# Altium PCB PMP30528_RevA.PcbDoc (part 1 of 3)
Units mil, origin at the board's own origin, x right, y up, seen from the top; angles counter-clockwise.
Board outline 2735.03 x 1328.78 mil, 2 copper layers (Top Layer, Bottom Layer), stack 62 mil thick; 91 components, 42 nets, 252 pads, 63 vias.
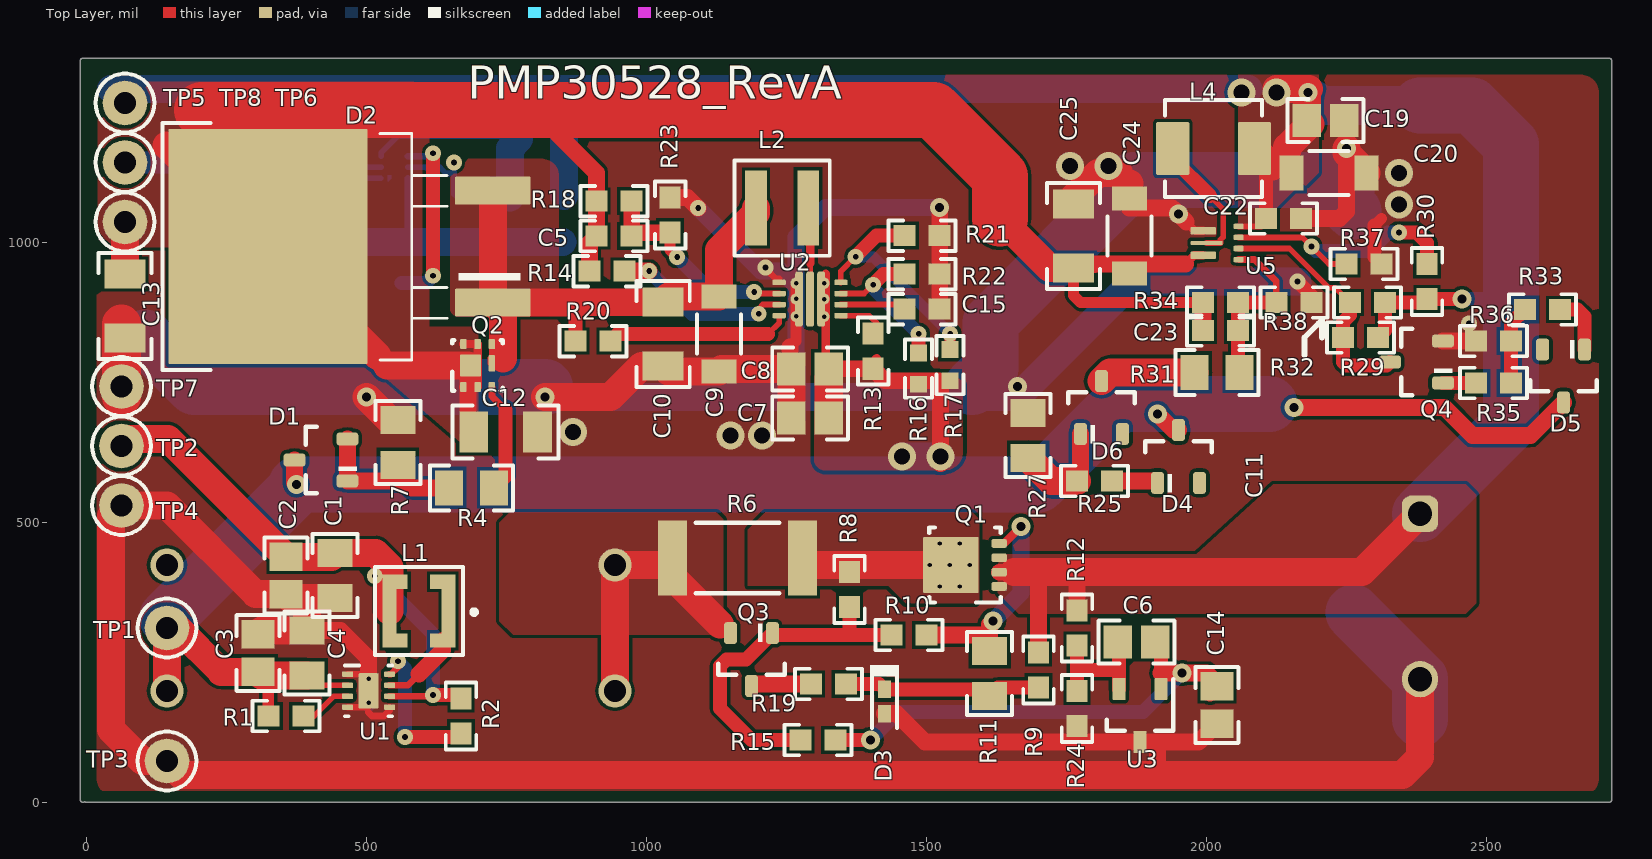
[diagram p0: Top Layer view]
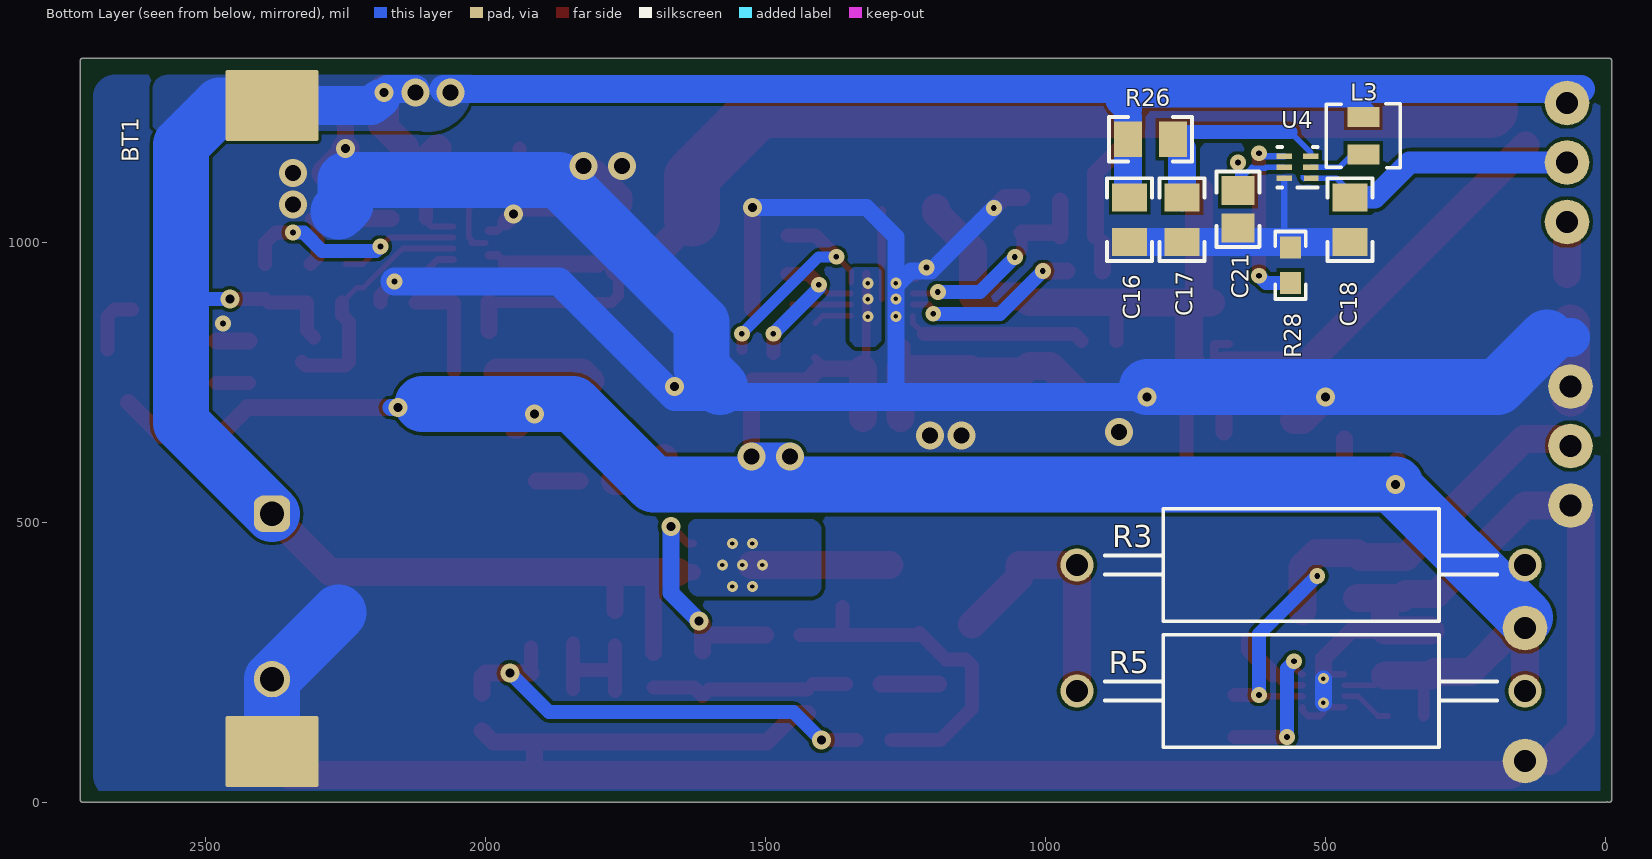
[diagram p1: Bottom Layer view, seen from below]

## Layer stack, top to bottom
Top Solder: solder mask 0.4, Solder Resist, Dk 3.5
Top Layer: signal copper 1.4
Dielectric1: core 59.2, FR-4, Dk 4.8
Bottom Layer: signal copper 1.4
Bottom Solder: solder mask 0.4, Solder Resist, Dk 3.5

## Board outline
-11.26,6.25 -11.26,1325 cw(c-6.25,1325) -6.25,1330.01 2718.75,1330.01 cw(c2718.75,1325) 2723.76,1325 2723.76,6.25 cw(c2718.75,6.25) 2718.75,1.23 0,1.23 cw(c0,6.25) -3.12,2.33 cw(c-6.25,6.25)

## Design rules (kind name [scope] priority, off if disabled: settings)
AcuteAngle [All] p1: minimum=2.80000000000000E+0001 checktracksonly=FALSE
AssemblyTestPointUsage [All] p1: valid=2
BoardOutlineClearance BoardOutlineClearance_MountingHoles [OnCopper and InComponentClass('Mounting Holes')] p1: gap=20 ignorepadtopadclearanceinfootprint=FALSE
BoardOutlineClearance BoardOutlineClearance_Poly [OnCopper and IsPoly] p2: gap=20 ignorepadtopadclearanceinfootprint=FALSE
BoardOutlineClearance [OnCopper and Not InComponentClass('Logo') and not InComponentClass('FiducialMark') and not InRegion(1000,500,4000,800) and not InPoly] p3: gap=15 ignorepadtopadclearanceinfootprint=FALSE
Clearance Clearance_Keepouts [((IsTrack Or IsArc) And Not InPoly) And IsFree and IsKeepOut vs ((IsTrack Or IsArc) And Not InPoly) And IsFree and IsKeepOut] p1: gap=0 ignorepadtopadclearanceinfootprint=FALSE
Clearance Clearance_Poly [InPolygon] p2 off: gap=30 ignorepadtopadclearanceinfootprint=FALSE
Clearance Clearance_FiducialMark [IsKeepOut and InComponentClass('FiducialMark') vs IsPad and InComponentClass('FiducialMark')] p3: gap=0 ignorepadtopadclearanceinfootprint=FALSE
Clearance [All] p4: gap=6 ignorepadtopadclearanceinfootprint=FALSE
ComponentClearance ComponentClearance_MountingHoles_FiducialMarks [InComponentClass('Mounting Holes') vs InComponentClass('FiducialMark')] p1: gap=20 collisioncheckmode=3 verticalgap=6 showdistances=FALSE
ComponentClearance ComponentClearance_Shunt [InComponentClass('Header') vs InComponentClass('Shunt')] p2: gap=0 collisioncheckmode=3 verticalgap=0 showdistances=FALSE
ComponentClearance ComponentClearance_Logo [InComponentClass('Logo')] p3: gap=20 collisioncheckmode=3 verticalgap=10 showdistances=FALSE
ComponentClearance ComponentClearance_ScrewToNut [(HasFootprint('NY PMS 440 0025 PH')) vs (HasFootprint('Keystone_1902C'))] p4: gap=5 collisioncheckmode=3 verticalgap=6 showdistances=FALSE
ComponentClearance ComponentClearance_MountingHoles [InComponentClass('Mounting Holes')] p5: gap=25 collisioncheckmode=3 verticalgap=100000 showdistances=FALSE
ComponentClearance ComponentClearance_SmallPassives [HasFootprint('0201*') or HasFootprint('0402*') or HasFootprint('0508') or HasFootprint('0603*') or HasFootprint('0612') or HasFootprint('0805*') or HasFootprint('0815*') or HasFootprint('0830*') or HasFootprint('1206*') or HasFootprint('1210*') or HasFootprint('1808*') or HasFootprint('1812*') or HasFootprint('1825*') or HasFootprint('2010*') or HasFootprint('2220*') or HasFootprint('2225*') or HasFootprint('2512*') or HasFootprint('2728*') or HasFootprint('3518*') vs HasFootprint('0201*') or HasFootprint('0402*') or HasFootprint('0508') or HasFootprint('0603*') or HasFootprint('0612') or HasFootprint('0805*') or HasFootprint('0815*') or HasFootprint('0830*') or HasFootprint('1206*') or HasFootprint('1210*') or HasFootprint('1808*') or HasFootprint('1812*') or HasFootprint('1825*') or HasFootprint('2010*') or HasFootprint('2220*') or HasFootprint('2225*') or HasFootprint('2512*') or HasFootprint('2728*') or HasFootprint('3518*')] p6: gap=6 collisioncheckmode=3 verticalgap=6 showdistances=FALSE
ComponentClearance ComponentClearance_THtoSMT [IsThruComponent vs IsSMTComponent] p7: gap=6 collisioncheckmode=3 verticalgap=6 showdistances=FALSE
ComponentClearance ComponentClearance_THtoTH [IsThruComponent vs IsThruComponent] p8: gap=6 collisioncheckmode=3 verticalgap=6 showdistances=FALSE
ComponentClearance [All] p9: gap=10 collisioncheckmode=3 verticalgap=10 showdistances=FALSE
DiffPairsRouting [All] p1: maxlimit=100 minlimit=10 mostfreqgap=10 toplayer_minwidth=15 toplayer_maxwidth=15 toplayer_prefwidth=15 bottomlayer_minwidth=15 bottomlayer_maxwidth=15 bottomlayer_prefwidth=15 maxuncoupledlength=1000
FabricationTestPointUsage TestPointUsage [All] p1: valid=2 allowmultiple=FALSE
FabricationTestpoint Testpoint [All] p1: side=3 testpointundercomponent=TRUE minsize=40 maxsize=100 preferedsize=60 minholesize=0 maxholesize=40 preferedholesize=32 testpointgrid=1 allowsidetop=TRUE allowsidebottom=TRUE usegrid=TRUE gridtolerance=0.01
FanoutControl Fanout_LCC [IsLCC] p1: bgadir=Out bgaviamode=Centered fanoutstyle=Auto fanoutdirection=Alternating viagrid=1 // Fanout_LCC (Default Rule)
FanoutControl Fanout_BGA [IsBGA] p2: bgadir=Out bgaviamode=Centered fanoutstyle=Auto fanoutdirection=Alternating viagrid=1 // Fanout_BGA (Default Rule)
FanoutControl Fanout_Default [All] p4: bgadir=Out bgaviamode=Centered fanoutstyle=Auto fanoutdirection=Alternating viagrid=1 // Fanout_Default (Default Rule)
FanoutControl Fanout_Small [(CompPinCount < 5)] p5: bgadir=Out bgaviamode=Centered fanoutstyle=Auto fanoutdirection=OutThenIn viagrid=1 // Fanout_Small (Default Rule)
Height [All] p1: minheight=0 maxheight=3000 prefheight=500
HoleSize [All] p1: absolutevalues=TRUE maxlimit=251 minlimit=6 maxpercent=80.000 minpercent=20.000
MinimumAnnularRing MinimumAnnularRing_ThermalPadVias [IsVia and InAnyComponent] p1: minimumring=5
MinimumAnnularRing [All] p2: minimumring=6
MinimumSolderMaskSliver MinimumSolderMaskSliver_Logo [InComponentClass('Logo') vs InComponentClass('Logo')] p1: minsoldermaskwidth=0.7
MinimumSolderMaskSliver [All] p2: minsoldermaskwidth=1
PlaneConnect [All] p1: planeconnectstyle=Relief reliefexpansion=10 reliefentries=4 reliefconductorwidth=10 reliefairgap=10
PolygonConnect [All] p1: connectstyle=Direct reliefconductorwidth=10 reliefentries=4 polygonreliefangle="90 Angle" airgapwidth=10
RoutingVias ThermalPadVias [IsVia and InAnyComponent] p1: holewidth=7.87 width=19.68 viastyle="Through Hole" minholewidth=7.87 minwidth=19.68 maxholewidth=12.99 maxwidth=23.62
RoutingVias [All] p2: holewidth=16 width=34 viastyle="Through Hole" minholewidth=7.87 minwidth=26 maxholewidth=40 maxwidth=65
SilkToBoardRegionClearance [Not ((IsComment or IsDesignator) And (Hide <> 'False')) and not InRegion(1000,500,4000,800)] p1:
SilkToSilkClearance SilkToSilkClearance_Pb-FreeLogo [(HasFootprint('Pb-Free_Overlay_Medium') OR HasFootprint('Pb-Free_Overlay_Small')) vs (HasFootprint('Pb-Free_Overlay_Medium') OR HasFootprint('Pb-Free_Overlay_Small'))] p1 off: silktosilkclearance=0
SilkToSilkClearance [All] p2 off: silktosilkclearance=0
SilkToSolderMaskClearance SilkToComponentPadClearance [(IsPad or IsFill or IsRegion) and InAnycomponent] p1 off: minsilkscreentomaskgap=5 clearancetoexposedcopper=TRUE
SilkToSolderMaskClearance "Silk to Solder Mask Opening" [All] p2 off: minsilkscreentomaskgap=4 clearancetoexposedcopper=FALSE
SolderMaskExpansion [All] p1: expansion=1.97
Width [All] p1: maxlimit=100 minlimit=6 preferedwidth=10 checkconnectedcopper=TRUE
14 further rules are at their usual default settings.

## Components (designator, comment, footprint, x,y, rotation, side; value= is the part's Value field where it differs from the comment)
BT1 "BU2032SM-BT-GTR" MPD_BU2032SM-BT-GTR 2381.25,668.75 r90 bottom
C1 "GRM21BR71A106KE51K" 0805_HV 443.75,406.25 r270 top value=10uF
C2 "Used in BOM report" 0805 356.25,406.25 r270 top value=DNP
C3 "Used in BOM report" 0805 306.25,267.82 r90 top value=DNP
C4 "GRM21BZ71E106KE15L" 0805_HV 393.75,267.82 r90 top value=10uF
C5 "DNP" 0603 942.09,1012.43 r0 top
C6 "Used in BOM report" 0805 1875,287.5 r0 top value=DNP
C7 "Used in BOM report" 0805 1292.09,687.43 r180 top value=DNP
C8 "GRM21BZ71E106KE15L" 0805 1292.09,774.93 r180 top value=10uF
C9 "GRM31CR70J106KA01L" 1206_180 1129.59,837.43 r270 top value=10uF
C10 "Used in BOM report" 1206 1029.59,837.43 r270 top value=DNP
C11 "HV1625-2R7256-R" HV_1600x2840 2381.25,368.75 r270 top value=25F
C12 "C3216X7R1A106K085AC" 1206 748.34,662.5 r0 top value=10uF
C13 "C3216X7R1A106K085AC" 1206 68.75,887.5 r270 top value=10uF
C14 "Used in BOM report" 0805 2018.75,175 r270 top value=DNP
C15 "C0603X222K5RACTU" 0603 1492.09,881.92 r0 top value=2200pF
C16 "GRM21BR70J106KE76L" 0805_HV 850,1041.54 r270 bottom value=10uF
C17 "GRM21BR71H104KA01L" 0805_HV 756.25,1041.54 r270 bottom value=0.1uF
C18 "GRM21BR70J106KE76L" 0805_HV 456.25,1041.54 r270 bottom value=10uF
C19 "Used in BOM report" 0805 2212.5,1218.75 r0 top value=DNP
C20 "GRM31CR70J226KE19L" 1206_180 2218.75,1125 r0 top value=22uF
C21 "Used in BOM report" 0805 656.25,1060.29 r270 bottom value=DNP
C22 "GRM188R71H104KA93D" 0603 2137.5,1043.75 r0 top value=0.1uF
C23 "DNP" 0603 2025,843.75 r0 top
C24 "GRM31CR70J106KA01L" 1206_180 1862.5,1012.5 r90 top value=10uF
C25 "Used in BOM report" 1206 1762.5,1012.5 r90 top value=DNP
D1 "BZX84C3V9LT1G" SOT-23 418.75,612.5 r180 top value=3.9V
D2 "STPS20L15" DDPAK 479.59,993.68 r180 top
D3 "DNP" SOD-523 1425,181.25 r270 top
D4 "MMBZ5231BLT1G" SOT-23 1950,618.75 r90 top value=5.1V
D5 "DNP" SOT-23 2637.5,762.5 r270 top
D6 "BAT54-7-F" SOT-23 1812.5,706.25 r90 top value=30V
L1 "LPS3015-332MLB" LPS3015 593.75,342.82 r180 top value=3.3uH
L2 "XFL4020-222MEB" XFL4020 1242.09,1062.43 r180 top value=2.2uH
L3 "VLF302510MT-4R7M" VLF302510MT 432.55,1191.54 r270 bottom value=4.7uH
L4 "74437346010" WE-LHMI_4020 2012.5,1168.75 r180 top value=1uH
Q1 "CSD25402Q3A" DNH0008A 1568.75,425 r180 top value=-20V
Q2 "CSD15571Q2" DQK0006C 698.34,781.18 r90 top value=20V
Q3 "MMBT2907ALT1G" SOT-23 1187.5,256.25 r270 top value="60 V"
Q4 "DNP" SOT-23 2375,787.5 r180 top
R1 "CRCW06030000Z0EA" 0603 356.25,155.32 r0 top value=0
R2 "CRCW0603100KFKEA" 0603 668.75,155.32 r90 top value=100k
R3 "PNP300JR-73-47R" PNP300 543.75,425 r0 bottom value=47
R4 "CRCW0805100RFKEA" 0805_HV 687.5,562.5 r0 top value=100
R5 "DNP" PNP300 543.75,200 r0 bottom
R6 "CRCW25122R00JNEG" 2512 1162.5,437.5 r0 top value=2.0
R7 "CRCW080549K9FKEA" 0805_HV 556.25,643.75 r270 top value=49.9k
R8 "CRCW0603200RFKEA" 0603 1362.5,381.25 r90 top value=200
R9 "CRCW060310K0FKEA" 0603 1700,237.5 r90 top value=10.0k
R10 "Used in BOM report" 0603 1468.75,300 r180 top value=DNP
R11 "CRCW0805100RFKEA" 0805_HV 1612.5,231.25 r90 top value=100
R12 "CRCW0603200RFKEA" 0603 1768.75,312.5 r90 top value=200
R13 "CRCW06030000Z0EA" 0603 1404.59,806.92 r90 top value=0
R14 "CRCW06030000Z0EA" 0603 929.59,949.93 r180 top value=0
R15 "CRCW06032K00FKEA" 0603 1306.25,112.5 r180 top value=2.00k
R16 "Used in BOM report" 0603_HV 1485.84,775.67 r270 top value=DNP
R17 "Used in BOM report" 0603_HV 1542.09,781.92 r270 top value=DNP
R18 "CRCW0603562KFKEA" 0603 942.09,1074.93 r180 top value=562k
R19 "CRCW06030000Z0EA" 0603 1325,212.5 r0 top value=0
R20 "CRCW0603100KFKEA" 0603 904.59,824.93 r180 top value=100k
R21 "RC0603JR-070RL" 0603 1492.09,1013.17 r180 top value=0
R22 "RC0603JR-070RL" 0603 1492.09,944.42 r180 top value=0
R23 "CRCW0603150KFKEA" 0603 1042.09,1049.93 r270 top value=150k
R24 "CRCW060310K0FKEA" 0603 1768.75,168.75 r90 top value=10.0k
R25 "CRCW06030000Z0EA" 0603 1800,575 r0 top value=0
R26 "CRCW0805390RJNEA" 0805_HV 812.5,1185.29 r180 bottom value=390
R27 "CRCW080549K9FKEA" 0805_HV 1681.25,656.25 r270 top value=49.9k
R28 "CRCW06030000Z0EA" 0603 562.5,960.29 r90 bottom value=0
R29 "Used in BOM report" 0603 2275,831.25 r0 top value=DNP
R30 "Used in BOM report" 0603 2393.75,931.25 r270 top value=DNP
R31 "CRCW080549K9FKEA" 0805_HV 2018.75,768.75 r0 top value=49.9k
R32 "CRCW06030000Z0EA" 0603 2287.5,893.75 r180 top value=0
R33 "Used in BOM report" 0603 2600,881.25 r0 top value=DNP
R34 "CRCW0603453KFKEA" 0603 2025,893.75 r180 top value=453k
R35 "Used in BOM report" 0603 2512.5,750 r0 top value=DNP
R36 "Used in BOM report" 0603 2512.5,825 r0 top value=DNP
R37 "CRCW06030000Z0EA" 0603 2281.25,962.5 r180 top value=0
R38 "CRCW0603100KFKEA" 0603 2156.25,893.75 r180 top value=100k
TP1 "5000" Keystone5000 143.75,312.5 r0 top
TP2 "5000" Keystone5000 62.5,637.5 r90 top
TP3 "5001" Keystone5001 143.75,75 r90 top
TP4 "5001" Keystone5001 62.5,531.25 r90 top
TP5 "5000" Keystone5000 68.75,1250 r90 top
TP6 "5000" Keystone5000 68.75,1037.5 r90 top
TP7 "5001" Keystone5001 62.5,743.75 r90 top
TP8 "5000" Keystone5000 68.75,1143.75 r90 top
U1 "TPS62173DSGT" DSG0008A 503.75,200.32 r0 top
U2 "TPS62147RGXT" RGX0011A 1292.09,899.93 r270 top
U3 "TL431CDBZTG4" DBZ0003A_N 1881.25,156.25 r270 top
U4 "TPS610981DSER" DSE0006A 550,1135.29 r0 bottom
U5 "TPS61022RWUT" RWU0007A 2018.75,1000 r0 top

## Footprints (in the part's own frame and the unit in brackets; to place one, negate y for a bottom-side part, rotate by r counter-clockwise, add the part's x,y. Pads: shape width x height; smd on the part's side, far side on the other; paste and mask are expansions set on the pad)
0603 [mm] "0603 from SM-752 data"
  rect 1x0.95 smd: 1(-0.8,0) 2(0.8,0)
  silkscreen extent -1.52,-0.69 1.52,0.69, body extent -0.87,-0.47 0.87,0.47, height 1
0603_HV [mil] "Ernesto recommended land pattern.  26 mil between pads."
  rect 30x30 smd: 1(-28,0) 2(28,0)
  silkscreen extent -52,-24 52,24, body extent -34,-19 34,19, height 39
0805 [mm] "0805 from SM-752 data"
  rect 1.3x1.5 smd: 1(-0.85,0) 2(0.85,0)
  silkscreen extent -1.72,-0.97 1.72,0.97, body extent -1.1,-0.72 1.1,0.72, height 1.45
0805_HV [mil] "0805 with 30mil clearance between pads"
  rect 50x63 smd: 1(-40,0) 2(40,0)
  silkscreen extent -74,-40 74,40, body extent -43,-29 43,29, height 57
1206 [mm] "1206 from SM-752 data"
  rect 1.3x1.85 smd: 1(-1.45,0) 2(1.45,0)
  silkscreen extent -2.4,-1.21 2.4,1.21, body extent -1.7,-0.9 1.7,0.9, height 1.35
1206_180 [mm] "1206_180"
  rect 1.1x1.6 smd: 1(-1.7,0) 2(1.7,0)
  silkscreen extent -0.9,-1 0.9,1, body extent -1.75,-0.95 1.75,0.95, height 1.8
2512 [mm] "Chip Resistor, Body 6.3x3.2mm, IPC Medium Density"
  rect 1.3x3.4 smd: 1(-2.95,0) 2(2.95,0)
  silkscreen extent -1.9,-1.6 1.9,1.6, body extent -3.22,-1.67 3.22,1.67, height 0.71
DBZ0003A_N [mm] "SOT23, 3-Leads, Body 2.9x1.3mm, Pitch 0.95mm, Lead Span 2.4mm, IPC Medium Density"
  rrect17% 1x0.6 smd: 1(-1.2,0.95) 2(-1.2,-0.95) 3(1.2,0)
  silkscreen extent -1.65,-1.5 0.7,1.5, body extent -1.26,-1.46 1.26,1.46, height 0.98
DDPAK [mil] "D2-PAK, 3-Pads, Body 9.7x10.4mm (max), TO-263AB, using Vishay Silionix recommended pad sizes"
  rrect8% 135x49.49 smd: 1(-246.06,100) 3(-246.06,-100)
  rrect1% 355x420 smd paste-181.1: 4(155.51,0)
  silkscreen extent -295,-220 344,220, body extent -295,-202 324,202, height 180
DNH0008A [mm] "8 pin VSONP, 0.65 mm pitch"
  rrect50% 0.7x0.4 smd paste-0.05 mask-0.05: 1(-1.55,0.975) 2(-1.55,0.325) 3(-1.55,-0.325) 4(-1.55,-0.975) 5(1.55,-0.975) 6(1.55,-0.325) 7(1.55,0.325) 8(1.55,0.975)
  rrect14% 0.705x1.125 on Top Paste: 9(-0.208,0.662) 9(-0.208,-0.663) 9(0.697,0.662) 9(0.697,-0.663)
  rrect6% 1.775x2.45 on Top Solder: 9(0.327,0)
  rrect4% 2.51x2.55 smd paste-1.5 mask-1.5: 9(0.645,0)
  rect 0.5x0.3 on Top Solder: 9(1.175,0.975) 9(1.175,-0.325) 9(1.175,0.325) 9(1.175,-0.975)
  silkscreen extent -1.62,-1.7 1.62,1.7, body extent -1.65,-1.65 1.65,1.66, height 0.91
DQK0006C [mm] "WSON"
  rrect12% 0.9x0.86 on Top Paste: 0(0,0.325)
  rrect34% 0.7x0.29 on Top Paste: 0(0.095,-0.65)
  rrect33% 0.45x0.3 smd: 1(-0.975,0.65) 2(-0.975,0) 3(-0.975,-0.65) 4(0.975,-0.65) 5(0.975,0) 6(0.975,0.65)
  rrect33% 0.75x0.3 smd paste-0.15: 7(0.095,-0.65)
  rrect11% 1x0.95 smd paste-0.5: 8(0,0.325)
  silkscreen extent -1.15,-1.15 1.15,1.15, body extent -1,-1 1,1, height 0.82
DSE0006A [mm] "TI recommended land pattern"
  rect 0.66x0.25 smd: 1(-0.62,0.5)
  rect 0.7x0.25 smd: 2(-0.6,0) 3(-0.6,-0.5) 4(0.6,-0.5) 5(0.6,0) 6(0.6,0.5)
  Top Layer region: -0.3,0.625 -0.25,0.625 -0.15,0.525 -0.15,0.375 -0.3,0.375
  silkscreen extent -0.9,-0.92 0.9,0.92, body extent -0.77,-0.77 0.77,0.77, height 0.8
DSG0008A [mm] "SON, 8-Leads, Body 2x2mm, Pitch 0.5mm, Thermal Pad 1.6x0.9mm, TI Recommended"
  rrect40% 0.5x0.25 smd: 1(-0.95,0.75) 2(-0.95,0.25) 3(-0.95,-0.25) 4(-0.95,-0.75) 5(0.95,-0.75) 6(0.95,-0.25) 7(0.95,0.25) 8(0.95,0.75)
  rrect14% 0.9x0.7 on Top Paste: 9(0,-0.45) 9(0,0.45)
  rrect11% 0.9x1.6 smd paste-0.45: 9(0,0)
  silkscreen extent -1.07,-1.15 1.07,1.15, body extent -1,-1 1,1, height 0.77
HV_1600x2840 [mm] "TH, 2-Leads, Dia 16mm, Pin Spacing 7.5mm"
  rrect50% 1.65x1.65 hole 1.1: 1(-3.75,0)
  round 1.65 hole 1.1: 2(3.75,0)
  body extent -8.25,-8.25 8.26,8.25, height 28.4
Keystone5000 [mil] "For Keystone 500x miniature loop terminals"
  round 80 hole 40: 1(0,0)
  silkscreen extent -52,-52 52,52, body extent -49,-49 49,49, height 182
Keystone5001 [mil] "For Keystone 500x miniature loop terminals"
  round 80 hole 40: 1(0,0)
  silkscreen extent -52,-52 52,52, body extent -49,-49 49,49, height 182
LPS3015 [mm] "Coilcraft recommended land pattern.  Document 436-2, rev 12/3/08"
  rect 0.63x3.3 smd: 1(-1.335,0) 2(1.335,0)
  rect 1.14x0.64 smd: 1(-1.08,1.33) 1(-1.08,-1.33) 2(1.08,1.33) 2(1.08,-1.33)
  silkscreen extent -2.59,-2 2,2, body extent -1.58,-1.58 1.58,1.58, height 1.52
MPD_BU2032SM-BT-GTR [mm] "SMD, 2-Leads, Body 31.86x16mm"
  rrect3% 3.2x4.2 smd: 1(-14.65,0) 2(14.65,0)
  body extent -15.93,-8 15.93,8, height 5.2
PNP300 [mm] "yageo"
  round 1.5 hole 1: 1(-10.16,0) 2(10.16,0)
  silkscreen extent -8.89,-2.55 8.89,2.55, body extent -10.58,-2.55 10.58,2.55, height 5.1
RGX0011A [mm] "VQFN, 11-Leads, Body 3x2mm, Pitch 0.5mm"
  rrect40% 0.66x0.25 on Top Paste: 1(-0.86,0.5) 1(0,0.5) 1(0.86,0.5) 2(-0.86,0) 2(0,0) 2(0.86,0) 3(-0.86,-0.5) 3(0,-0.5) 3(0.86,-0.5)
  rrect57% 2.5x0.35 smd paste-2.4 mask-0.05: 1(0,0.5) 2(0,0) 3(0,-0.5)
  rrect40% 0.25x0.6 smd: 4(-0.75,-1.4) 5(-0.25,-1.4) 6(0.25,-1.4) 7(0.75,-1.4) 8(0.75,1.4) 9(0.25,1.4) 10(-0.25,1.4) 11(-0.75,1.4)
  body extent -1,-1.5 1,1.5, height 1
RWU0007A [mm] "VQFN-HR-7"
  rrect29% 0.475x0.35 on Top Paste: 1(-0.962,0.55) 1(-0.288,0.55) 3(-0.962,-0.55) 3(-0.288,-0.55)
  rrect29% 1.15x0.35 smd paste-0.5: 1(-0.625,0.55) 3(-0.625,-0.55)
  rrect50% 0.625x0.2 on Top Paste: 2(-0.888,0) 2(-0.062,0)
  rrect50% 1.45x0.2 smd paste-0.5: 2(-0.475,0)
  rrect40% 0.45x0.25 smd: 4(0.975,-0.75) 5(0.975,-0.25) 6(0.975,0.25) 7(0.975,0.75)
  body extent -1.05,-1.05 1.05,1.05, height 1.01
SOD-523 [mm] "NXP Semiconductor recommended land pattern, nominal STEP model"
  rect 0.8x0.6 smd paste-0.05: 1(-0.55,0) 2(0.55,0)
  silkscreen extent -1.65,-0.66 1.2,0.66, body extent -0.8,-0.4 0.8,0.4, height 0.72
SOT-23 [mm] "SOT23, 3-Leads, Body 2.9x1.3mm, Pitch 0.95mm, Lead Span 2.5mm, IPC Medium Density"
  rrect50% 1x0.6 smd: 1(-1.2,0.95) 2(-1.2,-0.95) 3(1.2,0)
  silkscreen extent -1.63,-1.5 0.7,1.5, body extent -1.16,-1.45 1.21,1.45, height 1
VLF302510MT [mm] "TDK"
  rect 0.9x1.45 smd: 1(-0.85,0) 2(0.85,0)
  silkscreen extent -1.45,-1.68 1.45,1.68, body extent -1.35,-1.6 1.35,1.6, height 1
WE-LHMI_4020 [mm] "WERTH"
  rrect7% 1.5x2.4 smd: 1(-1.85,0) 2(1.85,0)
  silkscreen extent -2.2,-2.2 2.2,2.2, body extent -2.15,-2.15 2.15,2.15, height 2
XFL4020 [mm] "Coilcraft XFL4020 7/18/12"
  rect 0.98x3.4 smd: 1(-1.181,0) 2(1.181,0)
  silkscreen extent -2.16,-2.16 2.16,2.16, body extent -2.15,-2.15 2.15,2.15, height 2.1

## Part data
BT1: library part CMP-0081781-1, "HOLDER CR2032 GOLD LEADS SMD", Manufacturer="Memory Protection Devices", Supplier Part Number 1=BU2032SM-BT-GCT-ND, ComponentLink1Description="Datasheet Link", ComponentLink1URL=http://www.memoryprotectiondevices.com/datasheets/BU2032SM-BT-GTR-datasheet.pdf, CompType="Battery Holder", Key=BU2032SM-BT-GTR, MountType=SMT, PackageReference=31.86x16mm, PartNumber=BU2032SM-BT-GTR, RoHS=Y, Supplier 1=Digi-Key
C1: "CAP, CERM, 10 µF, 10 V,+/- 10%, X7R, 0805", Cap_Case=0805, Manufacturer=MuRata, Supplier Part Number 1=490-6477-1-ND, TempCo=X7R, Tolerance_%=10, Value2=10V, ValueDisplayed=10µF, AEC Category=Q200, AEC Qualified=?, Cap_F=0.00001, ComponentLink1Description="Datasheet link", ComponentLink1URL=http://www.murata.com/~/media/webrenewal/support/library/catalog/products/capacitor/mlcc/c02e.ashx, CompType=Capacitor, Green_EU RoHS=Passed, Green_EU RoHS-2=Incomplete, Green_Lifecycle=Active, Green_REACh=Passed, LatestRevisionDate=2017-06-22, MountType=SMT, PackageReference=0805, PartNumber=GRM21BR71A106KE51K, Polarized=N, Published=2008-06-19, Publisher="Texas Instruments", RoHS=Y, SizeArea_mm2=2.5, SizeAreaWB_mm2=6.75, SizeX_mm=2, SizeY_mm=1.25, SizeZ_mm=1.45, Supplier 1=Digi-Key, Supplier 2=Mouser, Supplier Part Number 2=81-GRM21BR71A106KE1K, SymbolVersion=2008-07-09, TaMax_C=125, TaMin_C=-55, Technology=Ceramic, U/M=EA, VDC_V=10
C2 C3 C6 C7 C10 C14 C19 C21 C25: library part Capacitor, "CAP, CERM, xxxF, xxV, [TempCo], xx%, [PackageReference]", Alternate Manufacturer=-, Alternate PartNumber=-, ComponentLink1Description="Datasheet Link", ComponentLink1URL="Paste URL for datasheet here", CompType=Capacitor, LatestRevisionDate=2017-05-31, LatestRevisionNote="Added Alternate PartNumber and Alternate Manufacturer parameters to appropriate components.", Manufacturer="Used in BOM report", MountType="SMT or TH (used in PnP report)", PackageReference="Used in PnP output and some BOM reports", PartNumber="Used in BOM report", Polarized=N, Publisher="Texas Instruments", RoHS="Used in BOM report.  Use Y or N.", SymbolVersion=2008-07-09, U/M=EA
C4 C8: "CAP, CERM, 10 µF, 25 V,+/- 10%, X7R, 0805", Cap_Case=0805, Manufacturer=MuRata, Supplier Part Number 1=81-GRM21BZ71E106KE5L, TempCo=X7R, Tolerance_%=10, Value2=25V, ValueDisplayed=10µF, AEC Category=Q200, AEC Grade=N/A, AEC Qualified=N, Cap_F=0.00001, ComponentLink1Description="Datasheet link", ComponentLink1URL=http://search.murata.co.jp/Ceramy/image/img/A01X/G101/ENG/GRM21BZ71E106KE15-01.pdf, CompType=Capacitor, LatestRevisionDate=2017-06-22, MountType=SMT, PackageReference=0805, PartNumber=GRM21BZ71E106KE15L, Polarized=N, Published=2008-06-19, Publisher="Texas Instruments", RoHS=Y, SizeArea_mm2=2.5, SizeAreaWB_mm2=6.75, SizeX_mm=2, SizeY_mm=1.25, SizeZ_mm=1.45, Supplier 1=Mouser, SymbolVersion=2008-07-09, TaMax_C=125, TaMin_C=-55, Technology=Ceramic, U/M=EA, VDC_V=25
C5 C23: library part Capacitor, "CAP, CERM, xxxF, xxV, [TempCo], xx%, [PackageReference]", Alternate Manufacturer=-, Manufacturer="Used in BOM report", Alternate PartNumber=-, ComponentLink1Description="Datasheet Link", ComponentLink1URL="Paste URL for datasheet here", CompType=Capacitor, LatestRevisionDate=2017-05-31, LatestRevisionNote="Added Alternate PartNumber and Alternate Manufacturer parameters to appropriate components.", MountType="SMT or TH (used in PnP report)", PackageReference="Used in PnP output and some BOM reports", PartNumber=DNP, Polarized=N, Publisher="Texas Instruments", RoHS="Used in BOM report.  Use Y or N.", SymbolVersion=2008-07-09, U/M=EA
C9 C24: "CAP, CERM, 10 µF, 6.3 V,+/- 10%, X7R, 1206", Cap_Case=1206, Manufacturer=MuRata, Supplier Part Number 1=490-1806-1-ND, TempCo=X7R, Tolerance_%=10, Value2=6.3V, ValueDisplayed=10µF, AEC Category=Q200, AEC Qualified=?, Cap_F=0.00001, ComponentLink1Description="Datasheet link", ComponentLink1URL=http://search.murata.co.jp/Ceramy/PnsearchViewAction.do?HnOFG=ON&HnNFG=ON&SEL_CNT=50&sLang=en&sKey=GRM31CR70J106KA01L&x=9&y=9&search=startwith, CompType=Capacitor, LatestRevisionDate=2017-06-22, MountType=SMT, PackageReference=1206, PartNumber=GRM31CR70J106KA01L, Polarized=N, Published=2008-06-19, Publisher="Texas Instruments", RoHS=Y, SizeArea_mm2=5.12, SizeAreaWB_mm2=10.92, SizeX_mm=3.2, SizeY_mm=1.6, SizeZ_mm=1.8, Supplier 1=Digi-Key, Supplier 2=Mouser, Supplier 3=Farnell, Supplier Part Number 2=81-GRM426X106K6.3L, Supplier Part Number 3=9527729, SymbolVersion=2008-07-09, TaMax_C=125, TaMin_C=-55, Technology=Ceramic, U/M=EA, VDC_V=6.3
C11: library part CMP-0084049-1, "CAP, Electric Double Layer, 25000000 µF, 2.7 V,+30/-10%, 0.027 ohm, TH", Cap_Case=16x28.4mm, Manufacturer=Eaton, Tolerance_%=30%, Value1="0.027 ohm", Value2=2.7V, ValueDisplayed=25F, AEC Category=Q200, AEC Grade=N/A, AEC Qualified=N, Cap_F=25F, ComponentLink1Description="Datasheet link", ComponentLink1URL=http://www.cooperindustries.com/content/dam/public/bussmann/Electronics/Resources/product-datasheets/Bus_Elx_DS_4376_HV_Series.pdf, CompType=Capacitor, ESR_ohm=0.027, MountType=TH, PackageReference="Dia 16mm", PartNumber=HV1625-2R7256-R, Polarized=Y, RoHS=Y, Series=HV, SizeArea_mm2=256, SizeAreaWB_mm2=324, SizeX_mm=16, SizeY_mm=16, SizeZ_mm=28.4, TaMax_C=65°C, TaMin_C=-40°C, Technology="Electric Double Layer", VDC_V=2.7V
C12: library part CMP-0008687-2, "CAP, CERM, 10 uF, 6.3 V, +/- 10%, X7R, 1206", Cap_Case=1206, Manufacturer=TDK, Supplier Part Number 1=445-14793-1-ND, TempCo=X7R, Tolerance_%=10%, Value1="0.002454 ohm", Value2=6.3V, ValueDisplayed=10uF, AEC Category=Q200, AEC Grade=N/A, AEC Qualified=N, Cap_F=10µF, ComponentLink1Description="Datasheet link", ComponentLink1URL=https://product.tdk.com/en/search/capacitor/ceramic/mlcc/info?part_no=C3216X7R1A106K085AC, CompType=Capacitor, ESR_ohm=2.454m, IRMS_A=4.63182A, LatestRevisionDate=2017-03-09, MountType=SMT, PackageReference=1206, Polarized=N, Published=2008-06-19, Publisher="Texas Instruments", RoHS=Y, SizeArea_mm2=5.12, SizeAreaWB_mm2=10.92, SizeX_mm=3.2, SizeY_mm=1.6, SizeZ_mm=1.35, Supplier 1=Digi-Key, Supplier 2=Mouser, Supplier Part Number 2=810-C3216X7R1A106K085AC, TaMax_C=125°C, TaMin_C=-55°C, Technology=Ceramic, U/M=EA, VDC_V=6.3V
C13: library part CMP-0008687-2, "CAP, CERM, 1206", Cap_Case=1206, Manufacturer=TDK, PartNumber=DNP, Supplier Part Number 1=445-14793-1-ND, TempCo=X7R, Tolerance_%=10%, Value1="0.002454 ohm", Value2=10V, AEC Category=Q200, AEC Grade=N/A, AEC Qualified=N, Cap_F=10µF, ComponentLink1Description="Datasheet link", ComponentLink1URL=https://product.tdk.com/en/search/capacitor/ceramic/mlcc/info?part_no=C3216X7R1A106K085AC, CompType=Capacitor, ESR_ohm=2.454m, IRMS_A=4.63182A, LatestRevisionDate=2017-03-09, MountType=SMT, PackageReference=1206, Polarized=N, Published=2008-06-19, Publisher="Texas Instruments", RoHS=Y, SizeArea_mm2=5.12, SizeAreaWB_mm2=10.92, SizeX_mm=3.2, SizeY_mm=1.6, SizeZ_mm=1.35, Supplier 1=Digi-Key, Supplier 2=Mouser, Supplier Part Number 2=810-C3216X7R1A106K085AC, TaMax_C=125°C, TaMin_C=-55°C, Technology=Ceramic, U/M=EA, ValueDisplayed=DNP, VDC_V=DNP
C15: "CAP, CERM, 2200 pF, 50 V,+/- 10%, X7R, 0603", Cap_Case=0603, Manufacturer=Kemet, Supplier Part Number 1=399-5341-1-ND, TempCo=X7R, Tolerance_%=10, Value2=50V, ValueDisplayed=2200pF, AEC Category=Q200, AEC Qualified=?, Cap_F=0.0000000022, ComponentLink1Description="Datasheet link", ComponentLink1URL=http://www.kemet.com/kemet/web/homepage/kechome.nsf/vapubfiles/F3102_Y5V.pdf/$file/F3102_Y5V.pdf, CompType=Capacitor, Green_EU RoHS=Passed, Green_EU RoHS-2=Passed, Green_Lifecycle=Active, Green_REACh=Passed, LatestRevisionDate=2017-06-22, MountType=SMT, PackageReference=0603, PartNumber=C0603X222K5RACTU, Polarized=N, Published=2008-06-19, Publisher="Texas Instruments", RoHS=Y, SizeArea_mm2=1.28, SizeAreaWB_mm2=4.68, SizeX_mm=1.6, SizeY_mm=0.8, SizeZ_mm=1, Supplier 1=Digi-Key, Supplier 2=Mouser, Supplier 3=Farnell, Supplier Part Number 2=80-C0603X222K5R, Supplier Part Number 3=1414030, SymbolVersion=2008-07-09, TaMax_C=125, TaMin_C=-55, Technology=Ceramic, U/M=EA, VDC_V=50
C16 C18: "CAP, CERM, 10 µF, 6.3 V,+/- 10%, X7R, 0805", Cap_Case=0805, Manufacturer=MuRata, Supplier Part Number 1=490-3904-1-ND, TempCo=X7R, Tolerance_%=10, Value2=6.3V, ValueDisplayed=10µF, AEC Category=Q200, AEC Qualified=?, Cap_F=0.00001, ComponentLink1Description="Datasheet link", ComponentLink1URL=http://search.murata.co.jp/Ceramy/PnsearchViewAction.do?HnOFG=ON&HnNFG=ON&SEL_CNT=50&sLang=en&sKey=GRM21BR70J106KE76L&x=9&y=9&search=startwith, CompType=Capacitor, Green_EU RoHS=Passed, Green_EU RoHS-2=Incomplete, Green_Lifecycle=Active, Green_REACh=Passed, LatestRevisionDate=2017-06-22, MountType=SMT, PackageReference=0805, PartNumber=GRM21BR70J106KE76L, Polarized=N, Published=2008-06-19, Publisher="Texas Instruments", RoHS=Y, SizeArea_mm2=2.5, SizeAreaWB_mm2=6.75, SizeX_mm=2, SizeY_mm=1.25, SizeZ_mm=1.45, Supplier 1=Digi-Key, Supplier 2=Mouser, Supplier 3=Farnell, Supplier Part Number 2=81-GRM21BR70J106KE76, Supplier Part Number 3=1845768, SymbolVersion=2008-07-09, TaMax_C=125, TaMin_C=-55, Technology=Ceramic, U/M=EA, VDC_V=6.3
C17: "CAP, CERM, 0.1 µF, 50 V,+/- 10%, X7R, 0805", Cap_Case=0805, Manufacturer=MuRata, Supplier Part Number 1=490-1666-1-ND, TempCo=X7R, Tolerance_%=10, Value2=50V, ValueDisplayed=0.1µF, AEC Category=Q200, AEC Qualified=?, Cap_F=0.0000001, ComponentLink1Description="Datasheet link", ComponentLink1URL=http://search.murata.co.jp/Ceramy/PnsearchViewAction.do?HnOFG=ON&HnNFG=ON&SEL_CNT=50&sLang=en&sKey=GRM21BR71H104KA01L&x=9&y=9&search=startwith, CompType=Capacitor, Green_EU RoHS=Passed, Green_EU RoHS-2=Incomplete, Green_Lifecycle=Active, Green_REACh=Passed, LatestRevisionDate=2017-06-22, MountType=SMT, PackageReference=0805, PartNumber=GRM21BR71H104KA01L, Polarized=N, Published=2008-06-19, Publisher="Texas Instruments", RoHS=Y, SizeArea_mm2=2.5, SizeAreaWB_mm2=6.75, SizeX_mm=2, SizeY_mm=1.25, SizeZ_mm=1.45, Supplier 1=Digi-Key, Supplier 2=Mouser, Supplier 3=Farnell, Supplier Part Number 2=81-GRM40X104K50L, Supplier Part Number 3=8820120, SymbolVersion=2008-07-09, TaMax_C=125, TaMin_C=-55, Technology=Ceramic, U/M=EA, VDC_V=50
C20: "CAP, CERM, 22 µF, 6.3 V,+/- 10%, X7R, 1206", Cap_Case=1206, Manufacturer=MuRata, Supplier Part Number 1=GRM31CR70J226KE19L-ND, TempCo=X7R, Tolerance_%=10, Value2=6.3V, ValueDisplayed=22µF, AEC Category=Q200, AEC Qualified=?, Cap_F=0.000022, ComponentLink1Description="Datasheet link", ComponentLink1URL=http://search.murata.co.jp/Ceramy/PnsearchViewAction.do?HnOFG=ON&HnNFG=ON&SEL_CNT=50&sLang=en&sKey=GRM31CR70J226KE19L&x=9&y=9&search=startwith, CompType=Capacitor, LatestRevisionDate=2017-06-22, MountType=SMT, PackageReference=1206, PartNumber=GRM31CR70J226KE19L, Polarized=N, Published=2008-06-19, Publisher="Texas Instruments", RoHS=Y, SizeArea_mm2=5.12, SizeAreaWB_mm2=10.92, SizeX_mm=3.2, SizeY_mm=1.6, SizeZ_mm=1.8, Supplier 1=Digi-Key, Supplier 2=Mouser, Supplier 3=Farnell, Supplier Part Number 2=81-GRM31CR70J226KE9L, Supplier Part Number 3=1845771, SymbolVersion=2008-07-09, TaMax_C=125, TaMin_C=-55, Technology=Ceramic, U/M=EA, VDC_V=6.3
C22: "CAP, CERM, 0.1 µF, 50 V,+/- 10%, X7R, 0603", Cap_Case=0603, Manufacturer=MuRata, Supplier Part Number 1=490-1519-1-ND, TempCo=X7R, Tolerance_%=10, Value2=50V, ValueDisplayed=0.1µF, AEC Category=Q200, AEC Qualified=?, Cap_F=0.0000001, ComponentLink1Description="Datasheet link", ComponentLink1URL=http://search.murata.co.jp/Ceramy/PnsearchViewAction.do?HnOFG=ON&HnNFG=ON&SEL_CNT=50&sLang=en&sKey=GRM188R71H104KA93D&x=9&y=9&search=startwith, CompType=Capacitor, Green_EU RoHS=Passed, Green_EU RoHS-2=Incomplete, Green_Lifecycle=Active, Green_REACh=Passed, LatestRevisionDate=2017-06-22, MountType=SMT, PackageReference=0603, PartNumber=GRM188R71H104KA93D, Polarized=N, Published=2008-06-19, Publisher="Texas Instruments", RoHS=Y, SizeArea_mm2=1.28, SizeAreaWB_mm2=4.68, SizeX_mm=1.6, SizeY_mm=0.8, SizeZ_mm=1, Supplier 1=Digi-Key, Supplier 2=Mouser, Supplier 3=Farnell, Supplier Part Number 2=81-GRM39X104K50D, Supplier Part Number 3=8820023, SymbolVersion=2008-07-09, TaMax_C=125, TaMin_C=-55, Technology=Ceramic, U/M=EA, VDC_V=50
D1: "Diode, Zener, 3.9 V, 225 mW, SOT-23", Manufacturer="ON Semiconductor", Power_W=0.225, Supplier Part Number 1=BZX84C3V9LT1GOSCT-ND, Value1=0.225W, AEC Category=Q101, AEC Qualified=?, ComponentLink1Description="Datasheet link", ComponentLink1URL=http://www.onsemi.com/pub_link/Collateral/BZX84C2V4LT1-D.PDF, CompType=Zener, LatestRevisionDate=2017-06-20, LatestRevisionNote="Updated Supplier Data", MountType=SMT, PackageReference=SOT-23, PartNumber=BZX84C3V9LT1G, Published=2008-10-08, Publisher="Texas Instruments", RJA_CperW=556, RoHS=Y, SizeArea_mm2=7.5, SizeAreaWB_mm2=14, SizeX_mm=2.5, SizeY_mm=3, SizeZ_mm=1.1, Supplier 1=Digi-Key, Supplier 2=Newark, Supplier 3=Mouser, Supplier Part Number 2=98H0523, Supplier Part Number 3=863-BZX84C3V9LT1G, SymbolVersion=2010-08-25, U/M=EA, Vr_V=N/A, Vz_V=3.9
D2: library part DIODE_SCHOTTKY_A13C4, "Diode, Schottky", Alternate Manufacturer=-, Average Rectified Current=20A, Case/Package=TO-220-2, Forward Voltage=520mV, Manufacturer="Used in BOM report", Max Forward Surge Current (Ifsm)=310A, Max Operating Temperature=125°C, Max Repetitive Reverse Voltage (Vrrm)=15V, Max Reverse Leakage Current=6mA, Min Operating Temperature=-65°C, Package Quantity=50, Supplier Part Number 1=497-7551-5-ND, Alternate PartNumber=-, ComponentLink1Description="Datasheet Link", ComponentLink1URL="Paste URL for datasheet here", ComponentLink2Description=http://components.arrow.com/part/dataview/914748S8038659N7728, ComponentLink2URL=http://components.arrow.com/part/dataview/914748S8038659N7728, ComponentLink3Description=http://www.st.com/st-web-ui/static/active/en/resource/technical/document/datasheet/CD00001327.pdf, ComponentLink3URL=http://www.st.com/st-web-ui/static/active/en/resource/technical/document/datasheet/CD00001327.pdf, ComponentLink4Description=http://components.arrow.com/part/dataview/0323_00210149, ComponentLink4URL=http://components.arrow.com/part/dataview/0323_00210149, ComponentLink5Description=http://www.st.com/web/en/resource/technical/document/datasheet/CD00001327.pdf, ComponentLink5URL=http://www.st.com/web/en/resource/technical/document/datasheet/CD00001327.pdf, ComponentLink6Description=http://www.st.com/internet/com/TECHNICAL_RESOURCES/TECHNICAL_LITERATURE/DATASHEET/CD00001327.pdf, ComponentLink6URL=http://www.st.com/internet/com/TECHNICAL_RESOURCES/TECHNICAL_LITERATURE/DATASHEET/CD00001327.pdf, ComponentLink7Description=http://uk.rs-online.com/webdocs/0482/0900766b80482bb4.pdf, ComponentLink7URL=http://uk.rs-online.com/webdocs/0482/0900766b80482bb4.pdf, ComponentLink8Description=http://docs-usa.electrocomponents.com/techlib:/itc_doclist_US.htm?stockno=4858106, ComponentLink8URL=http://docs-usa.electrocomponents.com/techlib:/itc_doclist_US.htm?stockno=4858106, ComponentLink9Description=http://www.st.com/content/ccc/resource/technical/document/datasheet/4c/4c/63/5a/77/8a/44/2b/CD00001327.pdf/files/CD00001327.pdf/jcr:content/translations/en.CD00001327.pdf, ComponentLink9URL=http://www.st.com/content/ccc/resource/technical/document/datasheet/4c/4c/63/5a/77/8a/44/2b/CD00001327.pdf/files/CD00001327.pdf/jcr:content/translations/en.CD00001327.pdf, CompType=Diode, Current Rating=20A, Element Configuration=Single, Forward Current=20A, Height=9.15mm, LatestRevisionDate=2017-05-31, LatestRevisionNote="Added Alternate PartNumber and Alternate Manufacturer parameters to appropriate components.", Lead Free="Lead Free", Length=10.4mm, Max Reverse Voltage (DC)=15V, Max Surge Current=310A, Mount="Through Hole", MountType="SMT or TH (used in PnP report)", Number of Pins=2, Output Current=20A, PackageReference="Used in PnP output and some BOM reports", Packaging=Rail/Tube, PartNumber=STPS20L15, Peak Non-Repetitive Surge Current=310A, Peak Reverse Current=6mA, Polarity=Standard, Pricing 1="1=1.79, 10=1.607, 100=1.2916, 500=1.0612, 1000=0.8792 (USD)", Publisher="Texas Instruments", Radiation Hardening=No, RoHS="Used in BOM report.  Use Y or N.", Supplier 1=Digi-Key, SymbolVersion=2010-03-23, U/M=EA, Voltage Rating (DC)=15V, Width=4.6mm
D3: library part BZT52C2V7T-7, "Diode, Zener", Manufacturer="Diodes Inc.", Power_W=0.3, Supplier Part Number 1=BZT52C2V7T-7DICT-ND, Value1=0.3W, AEC Category=Q101, AEC Qualified=?, ComponentLink1Description="Datasheet link", ComponentLink1URL=http://www.diodes.com/datasheets/ds30502.pdf, CompType=Zener, LatestRevisionDate=2017-06-20, LatestRevisionNote="Updated Supplier Data", MountType=SMT, PackageReference=SOD-523, PartNumber=DNP, Published=2008-10-08, Publisher="Texas Instruments", RJA_CperW=417, RoHS=Y, SizeArea_mm2=1.53, SizeAreaWB_mm2=5.13, SizeX_mm=1.7, SizeY_mm=0.9, SizeZ_mm=0.65, Supplier 1=Digi-Key, Supplier 2=Newark, Supplier 3=Mouser, Supplier Part Number 2=51R6414, Supplier Part Number 3=621-BZT52C2V7T-7, SymbolCreator=a0412235, SymbolVersion=2010-08-25, U/M=EA, Vr_V=N/A, Vz_V=2.7
D4: "Diode, Zener, 5.1 V, 225 mW, SOT-23", Manufacturer="ON Semiconductor", Power_W=0.225, Supplier Part Number 1=MMBZ5231BLT1GOSCT-ND, Value1=0.225W, AEC Category=Q101, AEC Qualified=?, ComponentLink1Description="Datasheet link", ComponentLink1URL=http://www.onsemi.com/pub_link/Collateral/MMBZ5221BLT1-D.PDF, CompType=Zener, Green_EU RoHS=Passed, Green_EU RoHS-2=Passed, Green_Lifecycle=Active, Green_REACh=Passed, LatestRevisionDate=2017-06-20, LatestRevisionNote="Updated Supplier Data", MountType=SMT, PackageReference=SOT-23, PartNumber=MMBZ5231BLT1G, Published=2008-10-08, Publisher="Texas Instruments", RJA_CperW=556, RoHS=Y, SizeArea_mm2=7.5, SizeAreaWB_mm2=14, SizeX_mm=2.5, SizeY_mm=3, SizeZ_mm=1.1, Supplier 1=Digi-Key, Supplier 2=Newark, Supplier 3=Mouser, Supplier Part Number 2=88H4809, Supplier Part Number 3=863-MMBZ5231BLT1G, SymbolVersion=2010-08-25, U/M=EA, Vr_V=N/A, Vz_V=5.1
D5: library part MMBZ5231BLT1G, "Diode, Zener", Manufacturer="ON Semiconductor", Power_W=0.225, Supplier Part Number 1=MMBZ5231BLT1GOSCT-ND, Value1=0.225W, AEC Category=Q101, AEC Qualified=?, ComponentLink1Description="Datasheet link", ComponentLink1URL=http://www.onsemi.com/pub_link/Collateral/MMBZ5221BLT1-D.PDF, CompType=Zener, Green_EU RoHS=Passed, Green_EU RoHS-2=Passed, Green_Lifecycle=Active, Green_REACh=Passed, LatestRevisionDate=2017-06-20, LatestRevisionNote="Updated Supplier Data", MountType=SMT, PackageReference=SOT-23, PartNumber=DNP, Published=2008-10-08, Publisher="Texas Instruments", RJA_CperW=556, RoHS=Y, SizeArea_mm2=7.5, SizeAreaWB_mm2=14, SizeX_mm=2.5, SizeY_mm=3, SizeZ_mm=1.1, Supplier 1=Digi-Key, Supplier 2=Newark, Supplier 3=Mouser, Supplier Part Number 2=88H4809, Supplier Part Number 3=863-MMBZ5231BLT1G, SymbolVersion=2010-08-25, U/M=EA, Vr_V=N/A, Vz_V=5.1
D6: "Diode, Schottky, 30 V, 0.2 A, SOT-23", Manufacturer="Diodes Inc.", Supplier Part Number 1=BAT54-FDICT-ND, Value1=0.2A, Value2=0.65V, AEC Category=Q101, AEC Qualified=?, ComponentLink1Description="Datasheet link", ComponentLink1URL=http://www.diodes.com/datasheets/ds11005.pdf, CompType=Diode, Green_EU RoHS=Passed, Green_EU RoHS-2=Passed, Green_Lifecycle=Active, Green_REACh=Passed, Io_A=0.2, LatestRevisionDate=2017-06-19, MountType=SMT, PackageReference=SOT-23, PartNumber=BAT54-7-F, Published=2008-06-26, Publisher="Texas Instruments", RoHS=Y, SizeArea_mm2=7.5, SizeAreaWB_mm2=14, SizeX_mm=2.5, SizeY_mm=3, SizeZ_mm=1.1, Supplier 1=Digi-Key, Supplier 2=Mouser, Supplier Part Number 2=621-BAT54-F, SymbolVersion=2008-07-09, TJmax_C=125, Type=Schottky, U/M=EA, Vf_V=0.65, Vr_V=30
L1: "Inductor, Shielded Drum Core, Ferrite, 3.3 µH, 1.4 A, 0.13 ohm, SMD", Manufacturer=Coilcraft, Value1="0.13 ohm", Value2=1.4A, ValueDisplayed=3.3µH, AEC Category=Q200, AEC Qualified=?, ComponentLink1Description="Datasheet link", ComponentLink1URL=http://www.coilcraft.com/pdfs/lps3015.pdf, CompType=Inductor, DCR_ohm=0.13, Green_EU RoHS=Incomplete, Green_EU RoHS-2=Incomplete, Green_Lifecycle="Not Set", Green_REACh=Incomplete, Imax_A=1.4, Ind_H=3.3E-6, Irms="1.4A @ 40C rise", Isat="1.5A @ 30% inductance drop", LatestRevisionDate=2017-05-12, Material=Ferrite, MountType=SMT, PackageReference=LPS3015, PartNumber=LPS3015-332MLB, Published=2008-06-26, Publisher="Texas Instruments", RoHS=Y, SizeArea_mm2=8.7025, SizeAreaWB_mm2=15.6025, SizeX_mm=2.95, SizeY_mm=2.95, SizeZ_mm=1.4, SymbolVersion=2008-07-23, Technology="Shielded Drum Core"
L2: "Inductor, Shielded, Composite, 2.2 µH, 3.7 A, 0.02 ohm, SMD", Manufacturer=Coilcraft, Supplier Part Number 1=994-XFL4020-222MEB, Value1="0.02 ohm", Value2=3.7A, ValueDisplayed=2.2µH, AEC Category=Q200, AEC Qualified=?, ComponentLink1Description="Datasheet link", ComponentLink1URL=http://www.coilcraft.com/pdfs/xfl4020.pdf, CompType=Inductor, DCR_ohm=0.02, Green_EU RoHS=Incomplete, Green_EU RoHS-2=Incomplete, Green_Lifecycle="Not Set", Green_REACh=Incomplete, Imax_A=3.7, Ind_H=2.2E-6, Irms="8A @ 40C rise", Isat="3.7A @ 30% inductance drop", LatestRevisionDate=2017-05-12, Material=Composite, MountType=SMT, PackageReference=4x2x4mm, PartNumber=XFL4020-222MEB, Published=2008-06-26, Publisher="Texas Instruments", RoHS=Y, SizeArea_mm2=16, SizeAreaWB_mm2=25, SizeX_mm=4, SizeY_mm=4, SizeZ_mm=2.15, Supplier 1=Mouser, SymbolVersion=2008-07-23, Technology=Shielded
L3: "Inductor, Shielded, Ferrite, 4.7 µH, 0.86 A, 0.168 ohm, SMD", Manufacturer=TDK, Supplier Part Number 1=445-6773-1-ND, Value1="0.168 ohm", Value2=0.86A, ValueDisplayed=4.7µH, AEC Category=Q200, AEC Qualified=?, ComponentLink1Description="Datasheet link", ComponentLink1URL=http://product.tdk.com/inductor/ind/en/documents/inductor_commercial_power_vlf_en.pdf, CompType=Inductor, DCR_ohm=0.168, Green_EU RoHS=Passed, Green_EU RoHS-2=Incomplete, Green_Lifecycle=Active, Green_REACh=Passed, Imax_A=0.86, Ind_H=4.7E-6, Irms="1.08A @ 40C rise", Isat="0.86A @ 30% inductance drop", LatestRevisionDate=2017-06-22, Material=Ferrite, MountType=SMT, PackageReference=IND_3x1x2.5mm, PartNumber=VLF302510MT-4R7M, Published=2008-06-26, Publisher="Texas Instruments", RoHS=Y, SizeArea_mm2=8.64, SizeAreaWB_mm2=15.54, SizeX_mm=2.7, SizeY_mm=3.2, SizeZ_mm=1, Supplier 1=Digi-Key, SymbolVersion=2008-07-23, Technology=Shielded
L4: "Inductor, Shielded Drum Core, Powdered Iron, 1 µH, 8 A, 0.0083 ohm, SMD", Manufacturer="Wurth Elektronik", Supplier Part Number 1=732-3369-1-ND, Value1="0.0083 ohm", Value2=8A, ValueDisplayed=1µH, AEC Category=Q200, AEC Qualified=?, ComponentLink1Description="Datasheet link", ComponentLink1URL=http://katalog.we-online.de/kataloge/eisos/media/pdf/74437346010.pdf, CompType=Inductor, DCR_ohm=0.0083, Green_EU RoHS=Passed, Green_EU RoHS-2=Incomplete, Green_Lifecycle=Active, Green_REACh=Passed, Imax_A=8, Ind_H=1.0E-6, Irms="8A @ 40C rise", Isat="22A @ 20% inductance drop", LatestRevisionDate=2017-05-24, Material="Powdered Iron", MountType=SMT, PackageReference=4.45x1.8x4.06mm, PartNumber=74437346010, Published=2008-06-26, Publisher="Texas Instruments", RoHS=Y, SizeArea_mm2=18.067, SizeAreaWB_mm2=27.577, SizeX_mm=4.45, SizeY_mm=4.06, SizeZ_mm=2, Supplier 1=Digi-Key, SymbolVersion=2008-07-23, Technology="Shielded Drum Core"
Q1: "MOSFET, P-CH, -20 V, -15 A, DNH0008A (VSONP-8)", Alternate Manufacturer=None, Manufacturer="Texas Instruments", Supplier Part Number 1=CSD25402Q3A-ND, Value1="0.0077 ohm", Value2="7.5 nC", AEC Category=Q101, AEC Qualified=?, ChType=P, ComponentLink1Description="Datasheet link", ComponentLink1URL=http://www.ti.com/lit/ds/symlink/csd25402q3a.pdf, CompType=MOSFET, IdsMax_A=-15, LatestRevisionDate=2017-06-23, LatestRevisionNote="Added parts.", MountType=SMT, PackageReference=DNH0008A, PartNumber=CSD25402Q3A, Published=2008-06-19, Publisher="Texas Instruments", QgTyp_nC=7.5, Rdson45_ohm=0.0077, RoHS=Y, SizeArea_mm2=10.89, SizeAreaWB_mm2=18.49, SizeX_mm=3.3, SizeY_mm=3.3, SizeZ_mm=0.9, Supplier 1=Digi-Key, Supplier 2=Newark, Supplier 3=Mouser, Supplier Part Number 2=29X0650, Supplier Part Number 3=595-CSD25402Q3A, SymbolCreator=a0799628, SymbolVersion=2014-08-22, U/M=EA, VdsMax_V=-20, Vgs_V=-12
Q2: library part CMP-0000207-1, "MOSFET, N-CH, 20 V, 10 A, DQK0006C (WSON-6)", Alternate Manufacturer=None, Manufacturer="Texas Instruments", Supplier Part Number 1=CSD15571Q2-ND, Value1=19, Value2="2.5 nC", AEC Category=Q101, AEC Qualified=N, ChType=N, ComponentLink1Description="Datasheet link", ComponentLink1URL=http://www.ti.com/lit/ds/symlink/csd15571q2.pdf, CompType=MOSFET, IdsMax_A=10A, LatestRevisionDate=2017-03-09, LatestRevisionNote="Added parts.", MountType=SMT, PackageReference=DQK0006C, PartNumber=CSD15571Q2, Published=2008-06-19, Publisher="Texas Instruments", QgTyp_nC=2.5, Rdson45_ohm=19.2, RoHS=Y, SizeArea_mm2=4, SizeAreaWB_mm2=9, SizeX_mm=2, SizeY_mm=2, SizeZ_mm=0.8, Supplier 1=Digi-Key, Supplier 2=Newark, Supplier 3=Mouser, Supplier Part Number 2=06X5215, Supplier Part Number 3=595-CSD15571Q2, U/M=EA, VdsMax_V=20V, Vgs_V=20V
Q3: library part "MMBT2907ALT1G, ON Semiconductor", "Transistor, PNP, 60 V, 0.6 A, SOT-23", Manufacturer="ON Semiconductor", Supplier Part Number 1=MMBT2907ALT1GOSCT-ND, Value1="0.6 A", AEC Category=Q101, AEC Qualified=?, ComponentLink1Description="Datasheet link", ComponentLink1URL=http://www.onsemi.com/pub_link/Collateral/MMBT2907ALT1-D.PDF, CompType=BJT, Green_EU RoHS=Passed, Green_EU RoHS-2=Passed, Green_Lifecycle=Active, Green_REACh=Passed, IcRated_A=0.6, LatestRevisionDate=2017-06-09, MountType=SMT, NPN=0, PackageReference=SOT-23, PartNumber=MMBT2907ALT1G, PNP=1, Published=2008-07-31, Publisher="Texas Instruments", RoHS=Y, SizeArea_mm2=7.5, SizeAreaWB_mm2=14, SizeX_mm=2.5, SizeY_mm=3, SizeZ_mm=1.1, Supplier 1=Digi-Key, Supplier 2=Newark, Supplier 3=Mouser, Supplier Part Number 2=88H4785, Supplier Part Number 3=863-MMBT2907ALT1G, SymbolVersion=2008-07-31, TaMax_C=150, TaMin_C=-55, U/M=EA, Vceo_V=60, Vcesat1_V=1.6
Q4: library part "MMBT3904, Fairchild Semiconductor", "Transistor, NPN, 40 V, 0.2 A, SOT-23", Manufacturer="Fairchild Semiconductor", Supplier Part Number 1=MMBT3904FSCT-ND, Value1="0.2 A", Value2=300, AEC Category=Q101, AEC Qualified=?, ComponentLink1Description="Datasheet link", ComponentLink1URL=http://www.fairchildsemi.com/ds/MM/MMBT3904.pdf, CompType=BJT, Green_EU RoHS=Passed, Green_EU RoHS-2=Passed, Green_Lifecycle=Active, Green_REACh=Passed, HfeMax=300, IcRated_A=0.2, LatestRevisionDate=2017-06-09, MountType=SMT, NPN=1, PackageReference=SOT-23, PartNumber=DNP, PNP=0, Published=2008-07-31, Publisher="Texas Instruments", RoHS=Y, SizeArea_mm2=7.5, SizeAreaWB_mm2=14, SizeX_mm=2.5, SizeY_mm=3, SizeZ_mm=1.1, Supplier 1=Digi-Key, Supplier 2=Newark, Supplier 3=Farnell, Supplier Part Number 2=58K9431, Supplier Part Number 3=9846727, SymbolVersion=2008-07-31, TaMax_C=150, TaMin_C=-55, U/M=EA, Vceo_V=40, Vcesat1_V=0.2
R1 R13 R14 R19 R25 R28 R32 R37: "RES, 0, 5%, 0.1 W, 0603", Manufacturer=Vishay-Dale, Power_W=0.1, Supplier Part Number 1=541-0.0GCT-ND, TempCo="200 ppm/C", Tolerance_%=5, Value1=5%, Value2=0.1W, Value_Code=0000, ValueDisplayed=0, AEC Category=Q200, AEC Qualified=?, ComponentLink1Description="Datasheet link", ComponentLink1URL=http://www.vishay.com/docs/20035/dcrcwe3.pdf, CompType=Resistor, EIA_Code=E24, Green_EU RoHS="Passed with Exemption", Green_EU RoHS-2=Passed, Green_Lifecycle=Active, Green_REACh=Passed, LatestRevisionDate=2017-06-13, MountType=SMT, PackageReference=0603, PartNumber=CRCW06030000Z0EA, Published=2008-06-26, Publisher="Texas Instruments", Res_ohm=0, RoHS=Y, SizeArea_mm2=1.28, SizeX_mm=1.6, SizeY_mm=0.8, SizeZ_mm=1, Supplier 1=Digi-Key, Supplier 2=Newark, Supplier 3=Mouser, Supplier Part Number 2=52K8014, Supplier Part Number 3=71-CRCW0603-0-E3, SymbolVersion=2009-05-29, Technology="Thick Film", U/M=EA, VDC_V=75
R2 R20 R38: "RES, 100 k, 1%, 0.1 W, 0603", Manufacturer=Vishay-Dale, Power_W=0.1, Supplier Part Number 1=541-100KHCT-ND, TempCo="100 ppm/C", Tolerance_%=1, Value1=1%, Value2=0.1W, Value_Code=100k, AEC Category=Q200, AEC Qualified=?, ComponentLink1Description="Datasheet link", ComponentLink1URL=http://www.vishay.com/docs/20035/dcrcwe3.pdf, CompType=Resistor, EIA_Code=E96, Green_EU RoHS="Passed with Exemption", Green_EU RoHS-2=Passed, Green_Lifecycle=Active, Green_REACh=Passed, LatestRevisionDate=2017-06-13, MountType=SMT, PackageReference=0603, PartNumber=CRCW0603100KFKEA, Published=2008-06-26, Publisher="Texas Instruments", Res_ohm=100000, RoHS=Y, SizeArea_mm2=1.28, SizeX_mm=1.6, SizeY_mm=0.8, SizeZ_mm=1, Supplier 1=Digi-Key, Supplier 2=Newark, Supplier 3=Mouser, Supplier Part Number 2=42K3668, Supplier Part Number 3=71-CRCW0603-100K-E3, SymbolVersion=2009-05-29, Technology="Thick Film", U/M=EA, ValueDisplayed=100k, VDC_V=75
R3: "RES, 47, 5%, 3 W, 3W Axial resistor", Manufacturer="Yageo America", Power_W=3, Supplier Part Number 1=47AECT-ND, TempCo="300 ppm/C", Tolerance_%=5, Value1=5%, Value2=3W, Value_Code=47R0, ValueDisplayed=47, AEC Category=Q200, AEC Qualified=?, ComponentLink1Description="Datasheet link", ComponentLink1URL=http://www.yageo.com/documents/recent/High%20Power%20Type_PNP.pdf, CompType=Resistor, EIA_Code=E24, LatestRevisionDate=2017-05-10, MountType=TH, PackageReference="3W Axial resistor", PartNumber=PNP300JR-73-47R, Published=2013-01-08, Publisher="Texas Instruments", Res_ohm=47, RoHS=Y, Supplier 1=Digi-Key, SymbolVersion=2009-05-29, Technology="Metal Element", U/M=EA
R4 R11: "RES, 100, 1%, 0.125 W, 0805", Manufacturer=Vishay-Dale, Power_W=0.125, Supplier Part Number 1=541-100CCT-ND, TempCo="100 ppm/C", Tolerance_%=1, Value1=1%, Value2=0.125W, Value_Code=100R, ValueDisplayed=100, AEC Category=Q200, AEC Qualified=?, ComponentLink1Description="Datasheet link", ComponentLink1URL=http://www.vishay.com/docs/20035/dcrcwe3.pdf, CompType=Resistor, EIA_Code=E96, Green_EU RoHS="Passed with Exemption", Green_EU RoHS-2=Passed, Green_Lifecycle=Active, Green_REACh=Passed, LatestRevisionDate=2017-06-23, MountType=SMT, PackageReference=0805, PartNumber=CRCW0805100RFKEA, Published=2008-06-26, Publisher="Texas Instruments", Res_ohm=100, RoHS=Y, SizeArea_mm2=2.5, SizeX_mm=2, SizeY_mm=1.25, SizeZ_mm=1.45, Supplier 1=Digi-Key, Supplier 2=Newark, Supplier 3=Mouser, Supplier Part Number 2=52K9809, Supplier Part Number 3=71-CRCW0805-100-E3, SymbolVersion=2009-05-29, Technology="Thick Film", U/M=EA, VDC_V=150